# Altium PCB board_ordered.PcbDoc
Units mm, origin at the board's own origin, x right, y up, seen from the top; angles counter-clockwise.
Board outline 38 x 93.5 mm, 2 copper layers (Top Layer, Bottom Layer), stack 0.97 mm thick; 85 components, 62 nets, 308 pads, 297 vias.
Unrouted connection lines stored in the file: 1.
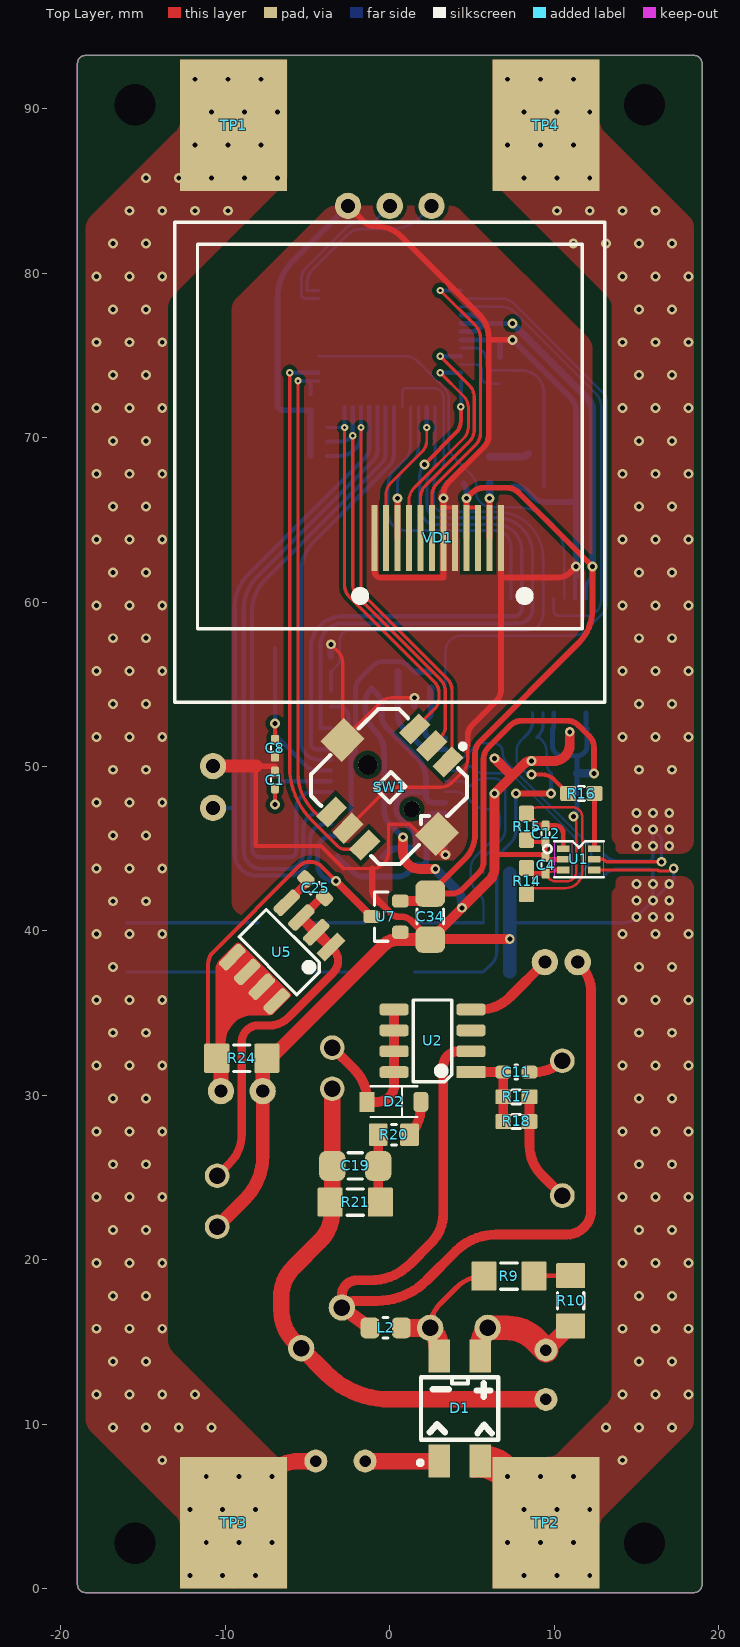
[diagram p0: Top Layer view]
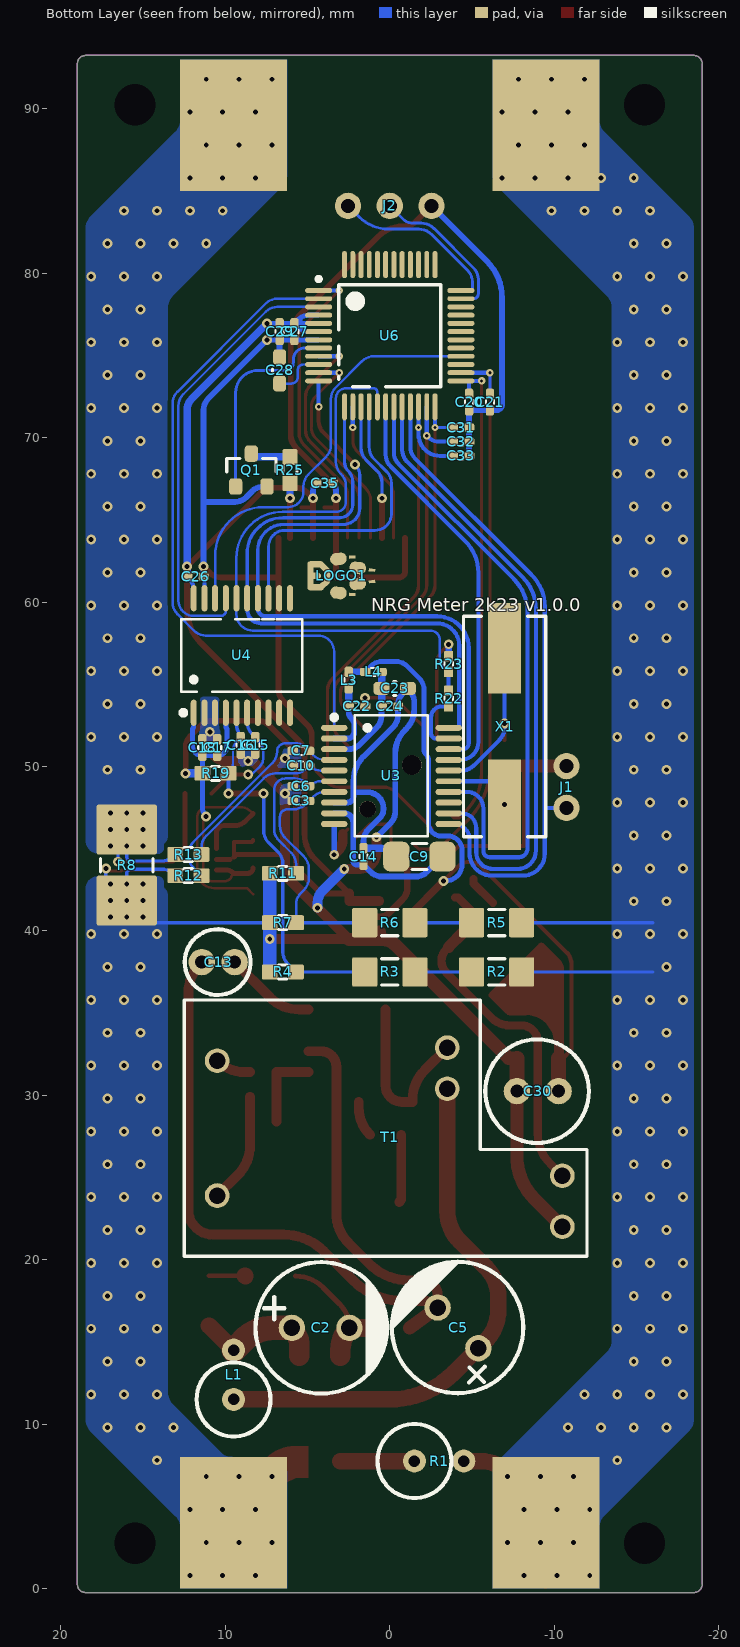
[diagram p1: Bottom Layer view, seen from below]
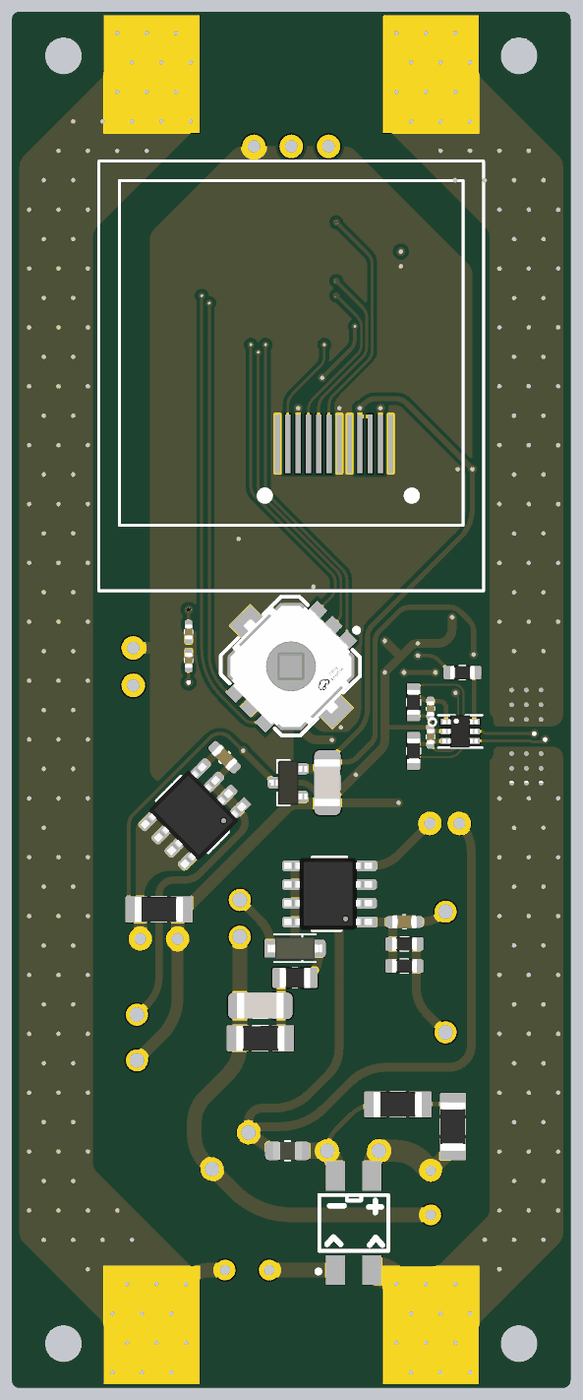
[diagram p2: 3D render of the assembled board from above, using the file's embedded part models]
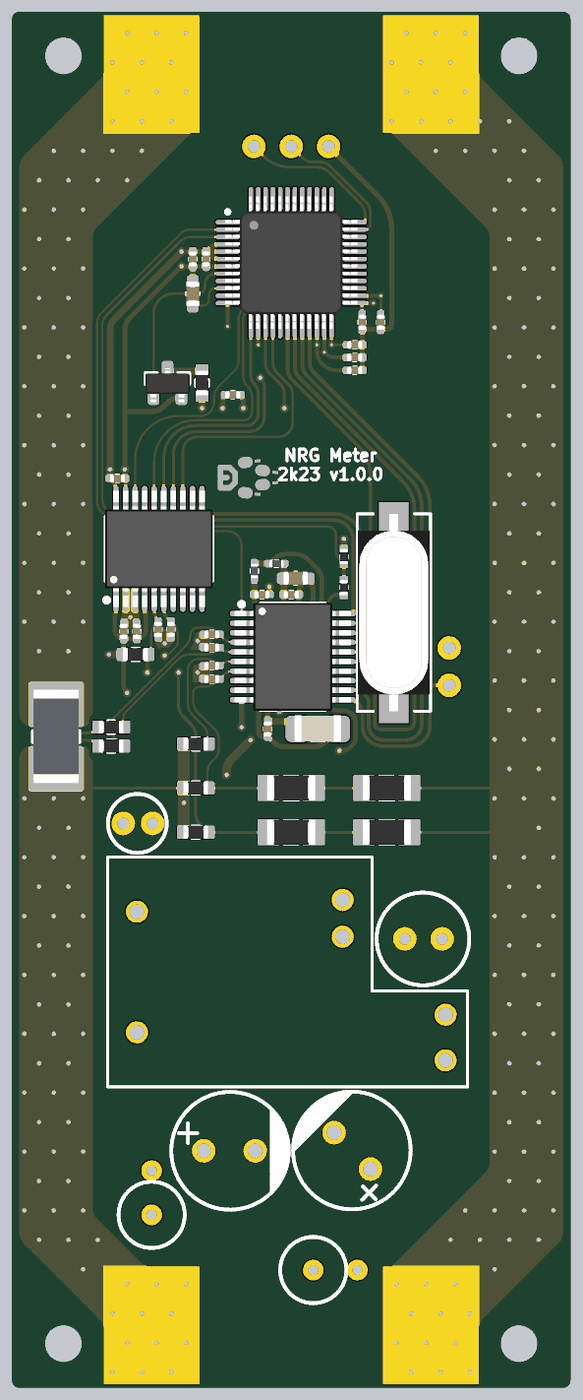
[diagram p3: 3D render of the assembled board from below, using the file's embedded part models]

## Layer stack, top to bottom
Top Solder: solder mask 0.0127, Solder Resist, Dk 3.8
Top Layer: signal copper 0.035
Dielectric: core 0.9, FR-4, Dk 4.5
Bottom Layer: signal copper 0.035
Bottom Solder: solder mask 0.0127, Solder Resist, Dk 3.8

## Board outline
-19,0.25 ccw(c-18.5,0.25) -18.5,-0.25 18.5,-0.25 ccw(c18.5,0.25) 19,0.25 19,92.75 ccw(c18.5,92.75) 18.5,93.25 -18.5,93.25 ccw(c-18.5,92.75) -19,92.75

## Design rules (kind name [scope] priority, off if disabled: settings)
AcuteAngle [All] p1: minimum=6.00000000000000E+0001 checktracksonly=FALSE
Clearance Clearance_1 [InNetClass('220')] p1: gap=2 ignorepadtopadclearanceinfootprint=FALSE except(0.13: Arc-Arc Arc-Track Arc-SMDPad Arc-Via Track-Track Track-SMDPad Track-Via SMDPad-SMDPad SMDPad-Via THPad-Via Via-Via; 0.15: Arc-THPad Arc-Text Arc-Hole Track-THPad Track-Text Track-Hole SMDPad-THPad SMDPad-Text SMDPad-Hole THPad-THPad THPad-Text THPad-Hole Via-Text Via-Hole Fill-Text Fill-Hole Poly-Text Poly-Hole Region-Text Region-Hole Text-Text Text-Hole)
Clearance [All] p2: gap=0.25 ignorepadtopadclearanceinfootprint=FALSE except(0.13: Arc-Arc Arc-Track Arc-SMDPad Arc-Via Track-Track Track-SMDPad Track-Via SMDPad-SMDPad SMDPad-Via THPad-Via Via-Via; 0.15: Arc-THPad Arc-Text Arc-Hole Track-THPad Track-Text Track-Hole SMDPad-THPad SMDPad-Text SMDPad-Hole THPad-THPad THPad-Text THPad-Hole Via-Text Via-Hole Fill-Text Fill-Hole Poly-Text Poly-Hole Region-Text Region-Hole Text-Text Text-Hole)
ComponentClearance ComponentClearance_1 [HasFootprint('HDR-1X3')] p1: gap=-1 collisioncheckmode=3 verticalgap=2540 showdistances=FALSE
ComponentClearance ComponentClearance_2 [HasFootprint('TP2030_SMD')] p2: gap=-1 collisioncheckmode=3 verticalgap=2540 showdistances=FALSE
ComponentClearance [All] p3: gap=0.3 collisioncheckmode=3 verticalgap=0.254 showdistances=FALSE
HoleSize [All] p1: absolutevalues=TRUE maxlimit=6 minlimit=0.2 maxpercent=80.000 minpercent=20.000
HoleToHoleClearance HoleToHoleClearance_1 [IsVia vs IsThruPin] p1: gap=0.7 allowstackedmicrovias=TRUE
HoleToHoleClearance [All] p2: gap=0.5 allowstackedmicrovias=TRUE
MinimumSolderMaskSliver [All] p1 off: minsoldermaskwidth=0.254
PlaneClearance [All] p1: clearance=0.45
PlaneConnect [All] p1: planeconnectstyle=Direct reliefexpansion=0.3 reliefentries=4 reliefconductorwidth=0.381 reliefairgap=0.178
PolygonConnect [All] p1: connectstyle=Direct reliefconductorwidth=0.381 reliefentries=4 polygonreliefangle="90 Angle" airgapwidth=0.356
RoutingVias [All] p1: holewidth=0.3 width=0.6 viastyle="Through Hole" minholewidth=0.2 minwidth=0.45 maxholewidth=0.9 maxwidth=1.27
SilkToSilkClearance [All] p1 off: silktosilkclearance=0.254
SilkToSolderMaskClearance [IsPad] p1 off: minsilkscreentomaskgap=0.254 clearancetoexposedcopper=TRUE
SolderMaskExpansion [All] p1: expansion=0.102 istentingtop=FALSE
UnRoutedNet [All] p1: checkbadconnections=TRUE
Width [All] p1: maxlimit=8 minlimit=0.14 preferedwidth=0.254
21 further rules are at their usual default settings.

## Components (designator, comment, footprint, x,y, rotation, side; value= is the part's Value field where it differs from the comment)
C1 "18pF" C0402 -6.982,49.175 r270 top
C2 "10uF" CAP-TH_BD8.0-P3.50-D0.6-FD_1 4.204,15.85 r180 bottom
C3 "33nF" C0402 5.409,47.902 r180 bottom
C4 "100nF" C0402 9.474,43.993 r270 top
C5 "10uF" CAP-TH_BD8.0-P3.50-D0.6-FD_1 -4.15,15.85 r45 bottom
C6 "33nF" C0402 5.409,48.806 r180 bottom
C7 "33nF" C0402 5.409,50.949 r180 bottom
C8 "18pF" C0402 -6.982,51.109 r90 top
C9 "10uF" C1206 -1.802,44.522 r180 bottom
C10 "33nF" C0402 5.409,50.045 r180 bottom
C11 "" C0603 7.7,31.406 r180 top
C12 "100nF" C0402 9.474,45.898 r90 top
C13 "4.7uF" CAP-TH_BD4.0-P2 10.435,38.1 r0 bottom
C14 "100nF" C0402 1.598,44.522 r270 bottom
C15 "33nF" C0402 8.179,51.283 r90 bottom
C16 "33nF" C0402 9.068,51.283 r90 bottom
C17 "100nF" C0402 10.5,51.15 r270 bottom
C18 "100nF" C0402 11.4,51.15 r270 bottom
C19 "" C1206 -2.1,25.7 r0 top
C20 "100nF" C0402 -4.825,72.161 r270 bottom
C21 "100nF" C0402 -6.092,72.161 r270 bottom
C22 "100nF" C0402 2,53.65 r0 bottom
C23 "1uF" C0603 -0.3,54.75 r0 bottom
C24 "100nF" C0402 0,53.65 r180 bottom
C25 "" C0603 -4.534,42.591 r315 top
C26 "100nF" C0402 11.828,61.544 r0 bottom
C27 "100nF" C0402 5.8,76.45 r90 bottom
C28 "100nF" C0603 6.7,74.092 r90 bottom
C29 "100nF" C0402 6.7,76.45 r90 bottom
C30 "680uF" CAP-TH_BD6.3-P2.54 -9,30.25 r0 bottom
C31 "100nF" C0402 -4.325,70.617 r0 bottom
C32 "100nF" C0402 -4.325,69.757 r0 bottom
C33 "100nF" C0402 -4.325,68.889 r0 bottom
C34 "10uF" C1206 2.464,40.866 r90 top
C35 "100nF" C0402 3.97,67.229 r0 bottom
D1 "MB10F-D" MINIDIP_4P-L4.7-W3.8-P2.50-LS7.0-BL 4.25,10.95 r0 top
D2 "1N4148WS" SOD-123 0.253,29.6 r180 top
J1 "CF" HDR-1X2_2.54 -10.75,48.75 r0 bottom
J2 "SWD" HDR-1X3_2.54 0,84.1 r90 bottom
L1 "" IND_TH 9.5,11.5 r90 bottom
L2 "" L0805 -0.25,15.85 r0 top
L3 "BEAD" L0402 2.5,55.25 r270 bottom
L4 "BEAD" L0402 1,55.75 r180 bottom
LOGO1 "LOGO" LOGO 4.826,61.595 r270 bottom
Q1 "PDTC143" SOT-23#1 8.423,68.029 r270 bottom
R1 "" IND_TH -1.5,7.75 r180 bottom
R2 "220k" R1206 -6.5,37.5 r0 bottom
R3 "220k" R1206 0,37.5 r0 bottom
R4 "3k3" R0603 6.5,37.5 r0 bottom
R5 "300k" R1206 -6.5,40.5 r0 bottom
R6 "300k" R1206 0,40.5 r0 bottom
R7 "1k" R0603 6.5,40.5 r0 bottom
R8 "" R2512-WIDE 16,44 r270 bottom
R9 "300k" R1206 7.25,19 r180 top
R10 "300k" R1206 11,17.5 r90 top
R11 "1k" R0603 6.5,43.5 r0 bottom
R12 "1k" R0603 12.25,43.356 r0 bottom
R13 "1k" R0603 12.25,44.644 r0 bottom
R14 "1k" R0603 8.319,43.028 r90 top
R15 "1k" R0603 8.319,46.33 r90 top
R16 "3k" R0603 11.65,48.354 r0 top
R17 "" R0603 7.7,29.906 r180 top
R18 "" R0603 7.7,28.406 r180 top
R19 "3k3" R0603 10.6,49.581 r180 bottom
R20 "" R0805 0.253,27.6 r180 top
R21 "" R1206 -2.1,23.5 r180 top
R22 "1k" R0402 -3.583,54.126 r270 bottom
R23 "2k" R0402 -3.584,56.226 r90 bottom
R24 "1k2" R1206 -9,32.25 r180 top
R25 "10" R0603 6.07,68.029 r90 bottom
SW1 "TM-4175-B-B" SW-SMD_TM-4175-B-X 0,48.75 r225 top
T1 "TRANS" TRANSFORMER 3.5,28 r180 bottom
TP1 "" TP2030_SMD -9.5,89 r180 top
TP2 "" TP2030_SMD 9.5,4 r180 top
TP3 "" TP2030_SMD -9.5,4 r180 top
TP4 "" TP2030_SMD 9.5,89 r180 top
U1 "INA199A2" SOT-363 11.5,44.35 r270 top
U2 "LP3715" SOIC-8 2.6,33.311 r90 top
U3 "ADE7753ARSZ" SSOP-20 -0.101,49.425 r270 bottom
U4 "MCP3561-E/ST" SSOP-20 9,56.75 r180 bottom
U5 "LP3568" SOIC-8 -6.579,38.709 r135 top
U6 "STM32G030C8T6" LQFP-48 0,76.2 r180 bottom
U7 "XC6206P332MR" SOT-23#2 -0.232,40.866 r0 top
VD1 "N133-2424TCBIG01-H12" LCD_PICO_1.3 0,68.5 r270 top
X1 "3.58MHz" HC-49S-SMD -6.982,52.428 r90 bottom

## Footprints (in the part's own frame and the unit in brackets; to place one, negate y for a bottom-side part, rotate by r counter-clockwise, add the part's x,y. Pads: shape width x height; smd on the part's side, far side on the other; paste and mask are expansions set on the pad)
C0402 [mm] "Chip Capacitor Body"
  rrect50% 0.635x0.508 smd mask+0.05: 1(-0.5,0) 2(0.5,0)
  silkscreen extent -0.13,-0.25 0.13,0.25, body extent -0.52,-0.27 0.53,0.28, height 0.55
C0603 [mil] "Chip Capacitor"
  rrect50% 38x31 smd mask+1.97: 1(-31.5,0) 2(31.5,0)
  silkscreen extent -3,-17 3,17, body extent -33,-18 33,18, height 35
C1206 [mm] "Chip Capacitor"
  rrect50% 1.6x1.8 smd: 1(-1.4,0) 2(1.4,0)
  silkscreen extent -0.45,-0.8 0.45,0.8, body extent -1.6,-0.88 1.6,0.92, height 1.6
CAP-TH_BD4.0-P2 [mm]
  round 1.6 hole 0.8 paste-2539.97 mask+0.051: 1(-1,0) 2(1,0)
  silkscreen extent -1.96,-2 2.04,2, body extent -2,-2 2.04,2, height 8
CAP-TH_BD6.3-P2.54 [mm]
  round 1.6 hole 0.8 paste-2539.97 mask+0.051: 1(-1.27,0) 2(1.27,0)
  silkscreen extent -3.11,-3.15 3.19,3.15, body extent -3.2,-3.2 3.2,3.2, height 8.3
CAP-TH_BD8.0-P3.50-D0.6-FD_1 [mm]
  round 1.6 hole 1 paste-2539.97 mask+0.051: 1(-1.75,0) 2(1.75,0)
  silkscreen extent -3.96,-4 4.04,4, body extent -4,-4 4,4, height 13
HC-49S-SMD [mm]
  rect 5.5x2 smd: 1(-4.75,0) 2(4.75,0)
  silkscreen extent -6.7,-2.5 6.7,2.5, body extent -6.7,-2.45 6.7,2.45, height 4.3
HDR-1X2_2.54 [mm]
  round 1.6 hole 0.85: 1(0,1.27) 2(0,-1.27)
HDR-1X3_2.54 [mm]
  round 1.6 hole 0.85: 1(0,2.54) 2(0,0) 3(0,-2.54)
IND_TH [mm]
  round 1.4 hole 0.7: 1(0,0) 2(3,0)
  silkscreen extent -2.25,-2.25 2.25,2.25, body extent -2.25,-2.25 2.25,2.25, height 9
L0402 [mm] "Chip Inductor"
  rrect50% 0.635x0.508 smd mask+0.05: 1(-0.5,0) 2(0.5,0)
  silkscreen extent -0.13,-0.25 0.13,0.25, body extent -0.5,-0.25 0.5,0.25, height 0.5
L0805 [mil] "Chip Inductor"
  rrect50% 45x50 smd mask+1.97: 1(-37.5,0) 2(37.5,0)
  silkscreen extent -6,-25 6,25, body extent -39,-24 39,24, height 35
LCD_PICO_1.3 [mm]
  rect 4x0.35 smd: 1(4.6,6.77) 2(4.6,6.07) 3(4.6,5.37) 4(4.6,4.67) 5(4.6,3.97) 6(4.6,3.27) 7(4.6,2.57) 8(4.6,1.87) 9(4.6,1.17) 10(4.6,0.47) 11(4.6,-0.23) 12(4.6,-0.93)
  silkscreen extent -14.6,-13.08 14.6,13.08, body extent -14.6,-13.08 14.6,13.08, height 1.51
LOGO [mil]
  rect 15.75x7.87 smd rot 93 mask+4: ""(-44.55,100)
  oval 30x40 smd rot 8 mask+4: ""(-40.55,67)
  oval 15x39.5 smd mask+4: ""(-27.5,12.5) ""(27.5,12.5)
  oval 15x36.21 smd rot 135 mask+4: ""(-20,32.5)
  oval 30x40 smd rot 173 mask+4: ""(-18.99,113.27)
  rect 15.75x7.87 smd rot 83 mask+4: ""(-13.91,147.15)
  oval 70x15 smd mask+4: ""(0,0)
  oval 15x32.5 smd mask+4: ""(0,9)
  oval 39.5x15 smd mask+4: ""(0,40)
  rect 15.75x7.87 smd rot 97 mask+4: ""(13.91,147.15)
  oval 30x40 smd rot 7 mask+4: ""(18.99,113.27)
  oval 15x36.21 smd rot 45 mask+4: ""(20,32.5)
  oval 30x40 smd rot 172 mask+4: ""(40.55,67)
  rect 15.75x7.87 smd rot 87 mask+4: ""(44.55,100)
LQFP-48 [mm]
  oval 1.65x0.3 smd: 1(-4.325,2.75) 2(-4.325,2.25) 3(-4.325,1.75) 4(-4.325,1.25) 5(-4.325,0.75) 6(-4.325,0.25) 7(-4.325,-0.25) 8(-4.325,-0.75) 9(-4.325,-1.25) 10(-4.325,-1.75) 11(-4.325,-2.25) 12(-4.325,-2.75) 25(4.325,-2.75) 26(4.325,-2.25) 27(4.325,-1.75) 28(4.325,-1.25) 29(4.325,-0.75) 30(4.325,-0.25) 31(4.325,0.25) 32(4.325,0.75) 33(4.325,1.25) 34(4.325,1.75) 35(4.325,2.25) 36(4.325,2.75)
  oval 0.3x1.65 smd: 13(-2.75,-4.325) 14(-2.25,-4.325) 15(-1.75,-4.325) 16(-1.25,-4.325) 17(-0.75,-4.325) 18(-0.25,-4.325) 19(0.25,-4.325) 20(0.75,-4.325) 21(1.25,-4.325) 22(1.75,-4.325) 23(2.25,-4.325) 24(2.75,-4.325) 37(2.75,4.325) 38(2.25,4.325) 39(1.75,4.325) 40(1.25,4.325) 41(0.75,4.325) 42(0.25,4.325) 43(-0.25,4.325) 44(-0.75,4.325) 45(-1.25,4.325) 46(-1.75,4.325) 47(-2.25,4.325) 48(-2.75,4.325)
  silkscreen extent -4.45,-3.1 3.1,3.57, body extent -4.5,-4.5 4.5,4.5, height 1.5
MINIDIP_4P-L4.7-W3.8-P2.50-LS7.0-BL [mm]
  rect 1.3x2 smd paste+0 mask+0.051: 1(-1.25,-3.2) 2(1.25,-3.2) 3(1.25,3.2) 4(-1.25,3.2)
  silkscreen extent -2.54,-3.44 2.35,1.9, body extent -2.5,-2 2.5,2, height 1.7
R0402 [mm]
  rrect10% 0.635x0.55 smd mask+0.05: 1(-0.476,0) 2(0.476,0)
  silkscreen extent -0.12,-0.25 0.13,0.25, body extent -0.52,-0.27 0.53,0.28, height 0.4
R0603 [mil] "Chip Resistor; Body 1.6 x 0.8 mm (LxW typ)"
  rrect20% 38x35.43 smd mask+1.97: 1(-31.5,0) 2(31.5,0)
  silkscreen extent -10,-17 10,17, body extent -33,-18 33,18, height 22
R0805 [mil] "Chip Resistor; Body 1.6 x 0.8 mm (LxW typ)"
  rrect15% 45x53.15 smd: 1(-37.5,0) 2(37.5,0)
  silkscreen extent -6,-25 6,25, body extent -41,-27 41,27, height 24
R1206 [mil] "Chip Resistor"
  rrect10% 60x70 smd mask+1.97: 1(-60,0) 2(60,0)
  silkscreen extent -20,-31 20,31, body extent -65,-33 65,33, height 26
R2512-WIDE [mm] "Chip Resistor; Body 6.4 x 3.2 mm (LxW typ)"
  rrect10% 3.05x3.68 smd mask+0.05: 1(-2.16,0) 2(2.16,0)
  silkscreen extent -0.4,-1.6 0.4,1.6, body extent -3.19,-1.55 3.16,1.55, height 0.55
SOD-123 [mm]
  rect 0.91x1.22 smd mask+0.05: 1(1.635,0)
  rrect50% 0.91x1.22 smd mask+0.05: 2(-1.635,0)
  silkscreen extent -1.43,-0.95 1.43,0.92, body extent -1.85,-0.77 1.85,0.77, height 1.44
SOIC-8 [mm]
  rect 0.72x1.78 smd mask+0.025: 1(-1.905,-2.34)
  rrect50% 0.72x1.78 smd mask+0.025: 2(-0.635,-2.34) 3(0.635,-2.34) 4(1.905,-2.34) 5(1.905,2.34) 6(0.635,2.34) 7(-0.635,2.34) 8(-1.905,2.34)
  silkscreen extent -2.49,-1.17 2.49,1.17, body extent -2.45,-2.9 2.45,3.1, height 1.7
SOT-23#1 [mm]
  rrect50% 1x0.8 smd mask+0.05: 1(1,-0.95) 2(1,0.95) 3(-1,0)
  silkscreen extent -0.7,-1.5 0.1,1.5, body extent -1.27,-1.5 1.33,1.5, height 1.1
SOT-23#2 [mm]
  rrect50% 1x0.8 smd mask+0.05: 1(0.875,-0.95) 2(0.875,0.95) 3(-0.875,0)
  silkscreen extent -0.7,-1.5 0.1,1.5, body extent -1.27,-1.5 1.33,1.5, height 1.1
SOT-363 [mil]
  rect 16x30 smd: 1(-25.59,-37.4) 2(0,-37.4) 3(25.59,-37.4) 4(25.59,37.4) 5(0,37.4) 6(-25.59,37.4)
  Top Layer keep-out region: -40.5,-15.75 -40.5,-59.06 40.5,-59.06 40.5,-15.75
  Top Layer keep-out region: -40.5,59.06 -40.5,15.75 40.5,15.75 40.5,59.06
  silkscreen extent -43,-85 43,59, body extent -43,-47 43,47, height 43
SSOP-20 [mm]
  oval 0.364x1.6 smd: 1(-2.925,-3.482) 2(-2.275,-3.482) 3(-1.625,-3.482) 4(-0.975,-3.482) 5(-0.325,-3.482) 6(0.325,-3.482) 7(0.975,-3.482) 8(1.625,-3.482) 9(2.275,-3.482) 10(2.925,-3.482) 11(2.925,3.482) 12(2.275,3.482) 13(1.625,3.482) 14(0.975,3.482) 15(0.325,3.482) 16(-0.325,3.482) 17(-0.975,3.482) 18(-1.625,3.482) 19(-2.275,3.482) 20(-2.925,3.482)
  silkscreen extent -3.71,-3.63 3.68,2.22, body extent -3.66,-3.95 3.66,3.95, height 1.98
SW-SMD_TM-4175-B-X [mm]
  rect 1.7x1 smd paste+0 mask+0.051: 1(-3.575,1.425) 2(-3.575,0.028) 3(-3.575,-1.425) 4(3.575,1.425) 5(3.575,-0.028) 6(3.575,-1.425)
  rect 2x1.8 smd paste+0 mask+0.051: 7(0,4.05) 7(0,-4.05)
  round 1 hole 1 unplated paste-2539.97: ""(0,1.9)
  round 1.2 hole 1.2 unplated paste-2539.97: ""(0,-1.9)
  silkscreen extent -5.04,-3.93 3.76,3.76, body extent -3.75,-4.28 3.75,4.22, height 5.65
TP2030_SMD [mm] "TP30_SMD"
  rect 6.5x8 all layers, no hole mask+0.05: 1(0,0)
TRANSFORMER [mm]
  round 1.5 hole 1: 1(-7,4.1) 2(-7,-4.1) 3(7,4.9) 4(7,2.4) 5(14,-2.9) 6(14,-6)
  silkscreen extent -9,-7.8 15.5,7.8, body extent -9,-7.8 15.5,7.8, height 12.5

## Part data
C1 C7 C8 C10: library part CAP, LCSC part number=C33149, P/N=GRM1555C1H180JA01D
C2 C5: library part 220uF, "01EC4138MHT10uF400V"
C3 C4 C6 C9 C11 C12 C14 C15 C16 C17 C18 C19 C20 C21 C22 C24 C25 C26 C27 C28 C29 C31 C32 C33 C34 C35: library part CAP
C13 C30: library part 220uF
C23: library part CAP, "1uF 50V 0603", LCSC part number=C90540, P/N=0603B105K500NT
D1: LCSC part number=C908753, P/N=MB10F-D
D2: library part US1M-13-F
J1: library part "Header 2"
J2: library part "Header 3"
L1 L2: library part BLM18AG601SN1D
L3 L4: library part BLM18AG601SN1D, "BEAD 0402", LCSC part number=C92615, P/N=CBG100505U600T
Q1: library part MMBT2222ALT1G, "PDTC143XT,215", LCSC part number=C183011, P/N=PDTC143XT,215
R1 R2 R3 R4 R5 R6 R7 R8 R9 R10 R11 R12 R13 R14 R15 R16 R17 R18 R19 R20 R21 R22 R23 R24 R25: library part RES
SW1: LCSC part number=C465996, P/N=TM-4175-B-B
T1: library part Component_2
TP1 TP2 TP3 TP4: library part TP_Dup1, LCSC part number=-, P/N=-
U1: library part MCP65R41T-2402
U2 U5: library part Component_1
U3: LCSC part number=C654528, P/N=ADE7753ARSZ
U7: library part Component_4_1
VD1: library part "Header 3", "N133-2424TCBIG01-H12 19650 Waveshare"
X1: library part "CRYSTAL 12MHZ 3.20mm x 2.50mm", "3.58MHz 20pF ±20ppm HC-49S"

## Free pads (board coordinates)
  round 0 hole 2.5 unplated: M(-15.5,2.75) M(-15.5,90.25) M(15.5,2.75) M(15.5,90.25)

## Via types
v1: diameter 0.6, hole 0.3, Top Layer to Bottom Layer, tented both sides, 287 vias
v2: diameter 0.45, hole 0.2, Top Layer to Bottom Layer, tented both sides, 10 vias

## Nets (pads, with @x,y where several pads share a name; then routed paths per layer and width w, separated by ;. In a path a pad name is that pad's centre, name@x,y a point inside that pad or via, vN(x,y) a via of type N, cw(c..) or ccw(c..) an arc to the next point about the centre after c; other vN are vias at no path point)
3V3: C4.2 C17.2 C18.2 C26.2 C27.2 C29.2 C34.2 C35.2 R14.2 R19.1 U1.3 U4.1 U4.4 U4.20 U6.4 U6.5 U6.6 U7.2 VD1.3 VD1.4 | length 105.9
  Top Layer w0.15: C4.2 9.579,43.493 ccw(c10.053,43.493) 10.053,43.019 10.765,43.019 ccw(c10.765,43.608) 11.354,43.608 11.354,46.535 ccw(c10.747,46.535) 11.352,46.586 ccw(c10.747,46.535) v1(11.176,46.965)
  Top Layer w0.25: VD1.4@4.67,65.754 VD1.3@5.37,65.754
  Top Layer w0.3: R14.2 ccw(c8.653,43.828) 8.653,43.493 C4.2 cw(c9.974,42.993) 9.974,43.7 U1.3
  Top Layer w0.35: VD1.4 4.67,65.754 v1(4.67,66.313) 5.021,66.664 cw(c5.722,65.964) 5.722,66.954 7.125,66.954 cw(c7.125,65.964) 7.826,66.664 v1(12.328,62.162) 12.328,59.533 cw(c9.48,59.533) 11.494,57.519 5.481,51.505 ccw(c6.181,50.805) 5.191,50.805 5.191,45.921 cw(c2.947,45.921) 4.534,44.335 C34.2 3.756,42.266 ccw(c3.756,43.256) 4.456,42.555 5.416,43.515 ; 5.417,43.516 ccw(c4.715,44.215) 5.706,44.215 5.706,50.457 cw(c6.697,50.457) 5.996,51.157 7.33,52.491 cw(c8.03,51.791) 8.03,52.781 10.791,52.781 cw(c10.791,51.791) 11.492,52.491 12.126,51.857 cw(c11.425,51.156) 12.416,51.156 v1(12.416,49.581)
  Top Layer w0.5: C34.2@1.974,41.761 C34.2@1.974,41.816
  Top Layer w0.6: U7.2 1.974,41.816 2.464,41.816 C34.2
  Bottom Layer w0.25: U4.20 11.925,60.73 cw(c12.916,60.73) 12.215,61.431 C26.2
  Bottom Layer w0.3: U6.6 4.921,76.45 ccw(c4.921,77.364) 5.568,76.718 C27.2 ; U6.5 C27.2 ; U6.4 4.921,77.45 cw(c4.921,76.536) 5.568,77.182 C27.2 ; v1(7.462,76.95) C29.2 C27.2 ; U4.4 9.975,52.424 cw(c9.864,52.424) 9.943,52.345 ccw(c10.045,52.243) 9.9,52.243 9.9,51.25 ccw(c10.5,51.25) C17.2 C18.2 ; v1(11.176,46.965) ccw(c10.635,47.505) 11.4,47.505 R19.1 C18.2 ; U4.1 11.925,52.424 ccw(c12.036,52.424) 11.957,52.345 cw(c11.855,52.243) 12,52.243 12,51.25 cw(c11.4,51.25) C18.2
  Bottom Layer w0.35: C35.2 cw(c3.987,66.746) 4.67,66.746 v1(4.67,66.313)
  Bottom Layer w0.45: v1(7.462,76.95) 12.038,72.374 ; 12.039,72.373 cw(c11.338,71.673) 12.328,71.673 v1(12.328,62.162) C26.2
  Bottom Layer w0.5: R19.1 v1(12.416,49.581)
5V: C30.1 L3.1 L4.1 R24.2 U5.5 U5.6 U5.7 U5.8 U7.3 | length 41.3
  Top Layer w0.25: R24.2 -11.049,32.775 -11.049,37.994 cw(c-10.058,37.994) -10.759,38.695 -5.545,43.909 cw(c-4.844,43.209) -4.144,43.909 v1(-3.277,43.042)
  Top Layer w0.45: v1@-3.28,43.039 U7.3
  Top Layer w0.9: C30.1 R24.2@-10.27,32.25
  Bottom Layer w0.3: v1(-3.277,43.042) -3.404,43.042 cw(c-3.404,44.032) -4.394,44.032 -4.394,44.907 cw(c-3.531,44.907) -3.531,45.771 -3.124,45.771 ccw(c-3.124,46.533) -2.362,46.533 -2.362,50.329 cw(c-1.743,50.329) -2.235,50.705 cw(c-1.743,50.329) -2.181,50.767 ccw(c-2.418,51.004) -2.083,51.004 -2.083,54.657 cw(c-1.092,54.657) -1.793,55.357 -1.052,56.098 cw(c-0.352,55.397) -0.352,56.388 0.452,56.388 cw(c0.452,55.397) 1.152,56.098 L4.1
  Bottom Layer w0.4: L4.1@1.578,55.75 L3.1
CF: J1.1 U3.11 U6.21 | length 40.5
  Bottom Layer w0.25: J1.1 -9.429,47.48 ; U3.11 -3.912,46.5 ccw(c-3.912,45.561) -4.851,45.561 -4.851,44.721 cw(c-6.214,44.721) -6.214,43.358 -8.093,43.358 cw(c-8.093,44.694) -9.429,44.694 -9.429,47.48 ; -1.54,68.742 -8.62,61.662 ccw(c-6.661,59.706) -9.429,59.706 -9.429,47.48 ; -1.539,68.742 ccw(c-2.241,69.442) -1.25,69.442 U6.21
CS_ADC: U4.13 U6.16 | length 18.7
  Bottom Layer w0.18: U6.16 1.25,69.402 cw(c0.259,69.402) 0.961,68.702 0.189,67.93 ccw(c0.889,67.23) -0.102,67.23 -0.102,65.354 ccw(c0.889,65.354) 0.889,64.364 6.384,64.364 cw(c6.384,63.373) 7.375,63.373 U4.13
CS_EM: U3.17 U6.18 | length 25
  Bottom Layer w0.25: U3.17 -4.311,50.4 cw(c-4.311,51.474) -5.385,51.474 -5.385,61.776 cw(c-2.633,61.776) -4.579,63.722 -0.04,68.26 ; -0.039,68.261 ccw(c-0.741,68.961) 0.25,68.961 U6.18
D_BL: Q1.1 U6.8 | length 12.4
  Bottom Layer w0.15: 6.351,74.092 7.396,74.092
  Bottom Layer w0.18: U6.8 5.17,75.45 cw(c5.17,74.752) 5.28,75.441 cw(c5.17,74.752) 5.867,74.752 5.867,74.576 ccw(c6.351,74.576) 6.351,74.092 ; 7.396,74.092 8.01,74.092 cw(c8.01,72.73) 9.373,72.73 Q1.1
D_CLK: U6.11 VD1.9 | length 13.4
  Top Layer w0.18: VD1.9 1.17,66.215 cw(c2.161,66.215) 1.46,66.916 4.485,69.941 ccw(c3.785,70.641) 4.775,70.641 4.775,71.831 ccw(c3.785,71.831) 4.486,72.531 v2(3.066,73.95)
  Bottom Layer w0.25: v2(3.066,73.95) U6.11
D_CS: U6.9 VD1.8 | length 14.4
  Top Layer w0.2: VD1.8 1.87,66.382 cw(c2.861,66.382) 2.16,67.083 4.84,69.762 ccw(c4.14,70.463) 5.13,70.463 5.13,72.476 ccw(c4.14,72.476) 4.841,73.176 ; v2(3.066,74.95) 4.84,73.176
  Bottom Layer w0.25: v2(3.066,74.95) U6.9
D_DATA: U6.15 VD1.10 | length 8.4
  Top Layer w0.35: VD1.10 v1(0.47,66.313)
  Bottom Layer w0.2: v1(0.47,66.313) 0.47,67.268 cw(c1.461,67.268) 0.759,67.968 ; 0.76,67.969 1.46,68.668 ; 1.461,68.669 ccw(c0.759,69.369) 1.75,69.369 U6.15
D_DC: U6.1 VD1.7 | length 18.4
  Top Layer w0.2: VD1.7 2.57,66.498 cw(c3.561,66.498) 2.86,67.198 5.224,69.562 ccw(c4.524,70.263) 5.514,70.263 5.514,76.092 ccw(c4.524,76.092) 5.225,76.791 v2(3.066,78.95)
  Bottom Layer w0.25: v2(3.066,78.95) U6.1
D_RST: U6.14 VD1.11 | length 8.9
  Top Layer w0.18: VD1.11 -0.23,66.543 cw(c0.761,66.543) 0.06,67.243 1.96,69.143 ccw(c1.259,69.843) 2.25,69.843 v2(2.25,70.616)
  Bottom Layer w0.25: v2(2.25,70.616) U6.14
ENC_A: C33.2 SW1.1 U6.22 | length 27.2
  Top Layer w0.2: v2(-1.75,70.616) -1.75,60.991 ccw(c-0.759,60.991) -1.46,60.291 3.494,55.337 cw(c2.794,54.636) 3.785,54.636 3.785,50.52 SW1.1
  Bottom Layer w0.25: C33.2 -3.056,68.889 ccw(c-3.056,70.196) -1.75,70.196 v2(-1.75,70.616) U6.22
ENC_B: C21.1 SW1.4 U6.26 | length 34.7
  Top Layer w0.2: v2(-6.092,73.95) -6.092,49.981 ccw(c-1.497,49.981) -4.746,46.732 -3.169,45.156 ccw(c-2.692,45.633) -2.692,44.958 -1.777,44.958 SW1.4
  Bottom Layer w0.2: C21.1 v2(-6.092,73.95)
  Bottom Layer w0.25: v2(-6.092,73.95) U6.26
ENC_BTN: C32.2 SW1.2 U6.23 | length 24.9
  Top Layer w0.2: v2(-2.25,70.108) -2.25,61.024 ccw(c-1.259,61.024) -1.961,60.325 ; -1.96,60.324 3.088,55.276 cw(c2.388,54.576) 3.378,54.576 3.378,52.407 cw(c2.609,52.407) 3.153,51.864 ; SW1.2 3.153,51.863
  Bottom Layer w0.25: C32.2 -3.011,69.757 ccw(c-3.011,70.748) -2.311,70.047 v2(-2.25,70.108) U6.23
ENC_C: C31.2 SW1.3 U6.24 | length 23.5
  Top Layer w0.2: v2(-2.75,70.616) -2.75,61.022 ccw(c-1.759,61.022) -2.461,60.322 2.707,55.154 cw(c2.007,54.454) 2.997,54.454 2.997,54.173 cw(c2.007,54.173) 2.708,53.473 ; SW1.3 2.707,53.472
  Bottom Layer w0.2: C31.2 v2(-2.75,70.616)
  Bottom Layer w0.25: v2(-2.75,70.616) U6.24
ENC_D: C20.1 SW1.6 U6.25 | length 29.9
  Top Layer w0.2: v2(-5.584,73.45) -5.584,49.579 ccw(c-2.377,49.579) -4.644,47.311 -4.22,46.887 -3.878,46.887 SW1.6
  Bottom Layer w0.2: U6.25@-4.825,73.45 U6.25
  Bottom Layer w0.25: v2(-5.584,73.45) -4.825,73.45 C20.1
GND: C1.1 C3.1 C4.1 C6.1 C7.1 C8.1 C9.1 C10.1 C12.1 C14.1 C15.1 C16.1 C17.1 C18.1 C20.2 C21.2 C22.1 C23.1 C24.2 C26.1 C27.1 C28.2 C29.1 C30.2 C31.1 C32.1 C33.1 C34.1 C35.1 D1.2 J1.2 J2.3 Q1.2 R4.2 R7.2 R8.2 R11.2 R12.2 R15.1 R23.2 R24.1 SW1.5 SW1.7 T1.6 TP2.1 U1.2 U1.4 U3.8 U3.10 U4.2 U4.3 U4.19 U6.7 U7.1 VD1.1 VD1.5 VD1.6 VD1.12 | length 269.3
  Top Layer w0.2: v1(-3.584,57.431) -3.154,57.001 cw(c-3.854,56.301) -2.994,56.791 cw(c-3.854,56.301) -2.864,56.301 -2.864,51.614 -0.589,53.888 cw(c0.111,53.188) 0.111,54.178 v1(1.499,54.178) ; -2.819,43.79 -1.067,43.79 ccw(c-1.067,44.78) -0.076,44.78 -0.076,46.482 1.228,46.482 SW1.7@2.238,45.471 ; SW1.5 -0.337,48.452 cw(c0.364,47.752) 0.364,48.743 3.095,48.743 ccw(c3.095,49.733) 3.795,49.033 4.409,49.646 ccw(c3.589,50.466) 4.748,50.466 4.748,51.257 ; SW1.7@2.558,46.192 SW1.7@2.864,45.886 ; U1.4 16.265,43.7 cw(c16.265,43.609) 16.329,43.673 ccw(c16.416,43.76) 16.416,43.637 16.877,43.637 ccw(c16.877,44.193) v1(17.27,43.8)
  Top Layer w0.25: -8.153,50.02 -8.153,45.161 -4.191,45.161 -2.819,43.79 ; VD1.6@3.27,65.754 VD1.5@3.97,65.754 ; R15.1 ccw(c8.45,45.53) 8.45,45.398 C12.1 C4.1
  Top Layer w0.3: 6.366,44.634 9.333,44.634 C4.1 ; C4.1@9.706,44.35 U1.2
  Top Layer w0.35: -8.153,50.02 -7,50.02 ; J2.3 -1.585,83.145 ; -1.584,83.144 ccw(c-0.884,83.845) -0.884,82.855 -0.805,82.855 cw(c-0.805,80.702) 0.717,82.224 5.412,77.529 cw(c3.945,76.062) 6.02,76.062 6.02,75.95 ; VD1.12 -0.93,61.868 ccw(c-0.556,61.868) -0.556,61.493 3.27,61.493 VD1.6 3.27,65.754 v1(3.27,66.313) 3.27,66.563 cw(c4.261,66.563) 3.56,67.263 5.73,69.433 ccw(c5.029,70.133) 6.02,70.133 6.02,75.95 ; 4.748,51.257 4.748,51.892 cw(c5.608,51.892) 5,52.5 6.48,53.98 ccw(c5.779,54.68) 6.77,54.68 6.77,61.493 ; VD1.1 6.77,61.493 ; v1(7.462,75.95) 6.02,75.95 ; v1(11.328,62.162) 10.95,61.784 cw(c10.25,62.484) 10.25,61.493 6.77,61.493
  Top Layer w0.4: -1.067,43.79 -1.067,42.611 ccw(c-0.076,42.611) -0.777,41.911 ; -0.777,41.91 0.086,41.048 ccw(c0.525,41.487) 0.525,40.866 0.653,40.866 cw(c0.653,39.875) 1.353,40.576 ; 1.354,40.575 C34.1
  Top Layer w0.6: v1(0.813,45.695) 0.813,44.755 ccw(c1.803,44.755) 1.803,43.764 v1(2.769,43.764) ; C34.1 C34.1@2.498,39.5 ; SW1.7@2.864,45.886 2.864,45.555 ccw(c3.854,45.555) 3.154,44.854 v1(3.381,44.628) ; v1(6.366,50.497) 7.437,49.425 ; v1(7.3,39.5) C34.1@2.498,39.5 ; v1(10.948,52.107) 10.948,51.321 cw(c9.957,51.321) 9.957,50.331 v1(8.611,50.331) ccw(c8.611,49.684) 8.153,50.141 7.437,49.425 ; C34.1@2.498,39.5 6.076,43.077 ccw(c5.375,43.778) 6.366,43.778 6.366,44.634 v1(6.366,48.354) 7.437,49.425
  Top Layer w0.8: J1.2 -8.153,50.02 ; T1.6 -8.86,23.64 ; -8.806,23.694 ccw(c-11.405,26.292) -7.73,26.292 C30.2 ; R24.1 -7.232,32.25 -0.306,39.175 cw(c0.394,38.475) 0.394,39.466 0.643,39.466 ; U7.1 0.643,39.466 ; C34.1 0.645,39.466 0.643,39.466
  Top Layer w0.9: C30.2 R24.1@-7.73,32.25
  Bottom Layer w0.2: R7.2 14.25,40.5 ccw(c14.25,41.491) 14.95,40.79 v1(16,41.84) ; R12.2 13.158,43.463 cw(c13.858,42.763) 13.858,43.753 15.732,43.753 cw(c15.732,43.485) 16,43.485 v1(16,41.84) ; v1(17.27,43.8) 17.27,43.11 v1(16,41.84)
  Bottom Layer w0.25: U4.19 11.275,61.491 C26.1
  Bottom Layer w0.3: U6.7 C29.1 v1(7.462,75.95)
  Bottom Layer w0.35: C33.1 C32.1 C31.1 C20.2 C21.2 -6.46,71.661 cw(c-6.46,72.034) -6.833,72.034 -6.833,78.501 cw(c-3.679,78.501) -5.909,80.731 J2.3 ; v1(0.813,45.695) -0.04,46.547 cw(c0.66,47.248) -0.33,47.248 -0.33,50.794 ccw(c-2.306,50.794) -0.909,52.192 -0.977,52.26 cw(c0.275,53.512) -1.496,53.512 -1.496,53.837 cw(c-0.246,53.837) -1.13,54.721 C23.1 -0.79,54.44 cw(c-1.491,53.739) -0.5,53.739 C24.2 -0.5,53.107 ccw(c0.491,53.107) -0.21,52.407 1.604,50.593 cw(c0.141,49.13) 2.21,49.13 2.21,48.438 ; C14.1 1.598,45.464 ccw(c0.608,45.464) 1.308,46.164 0.597,46.876 cw(c1.117,47.396) 0.381,47.396 0.381,47.447 cw(c1.372,47.447) 1.372,48.438 2.21,48.438 ; v1(3.27,66.313) 3.27,66.746 cw(c3.953,66.746) C35.1 ; v1(3.381,44.628) U3.10 ; U3.8 2.594,47.8 cw(c2.594,48.184) 2.21,48.184 2.21,48.438 ; C28.2 C29.1 ; v1(7.462,75.95) 11.038,72.374 cw(c10.338,71.673) 11.328,71.673 11.328,66.091 ; Q1.2 7.669,67.029 cw(c7.669,66.038) 8.369,66.738 8.727,66.381 ccw(c9.427,67.081) 9.427,66.091 11.328,66.091 ; C26.1 v1(11.328,62.162) 11.328,66.091
  Bottom Layer w0.4: R23.2 v1(-3.584,57.431) ; v1(1.499,54.178) 1.5,54.177 C22.1
  Bottom Layer w0.45: C9.1 C9.1@-0.192,44.732 ; C9.1@-0.191,44.733 cw(c0.508,44.032) 0.508,45.022 C14.1
  Bottom Layer w0.6: v1(2.769,43.764) 4.104,42.429 cw(c3.404,41.728) 4.394,41.728 v1(4.394,41.402)
  Bottom Layer w0.8: R4.2 v1(7.3,39.5) R7.2 R11.2
  other v1: 8.162,0.801 10.162,0.801 12.162,0.801 7.162,2.801 9.162,2.801 11.162,2.801 8.162,4.801 10.162,4.801 12.162,4.801 7.162,6.801 9.162,6.801 11.162,6.801 14.162,7.801 13.162,9.801 15.162,9.801 17.162,9.801 14.162,11.801 16.162,11.801 18.162,11.801 15.162,13.801 17.162,13.801 14.162,15.801 16.162,15.801 18.162,15.801 15.162,17.801 17.162,17.801 14.162,19.801 16.162,19.801 18.162,19.801 15.162,21.801 17.162,21.801 14.162,23.801 16.162,23.801 18.162,23.801 15.162,25.801 17.162,25.801 14.162,27.801 16.162,27.801 18.162,27.801 15.162,29.801 17.162,29.801 14.162,31.801 16.162,31.801 18.162,31.801 15.162,33.801 17.162,33.801 14.162,35.801 16.162,35.801 18.162,35.801 15.162,37.801 17.162,37.801 14.162,39.801 16.162,39.801 18.162,39.801 15,40.84 16,40.84 17,40.84 15,41.84 17,41.84 15,42.84 16,42.84 17,42.84
IRQ_ADC: U4.17 U6.3 | length 27.4
  Bottom Layer w0.15: U6.3 6.846,77.95 cw(c6.846,76.959) 7.545,77.661 ; 7.546,77.66 12.565,72.64 ; U4.17 9.975,59.446 ccw(c10.262,59.446) 10.262,59.159 11.927,59.159 ccw(c11.927,60.088) 12.856,60.088 12.856,71.94 ccw(c11.865,71.94) 12.566,72.64
IRQ_EM: U3.14 U6.19 | length 38.5
  Bottom Layer w0.25: U3.14 -4.699,48.45 ccw(c-4.699,47.459) -5.69,47.459 -5.69,44.869 cw(c-6.079,44.869) -6.079,44.479 -7.85,44.479 cw(c-7.85,45.011) -8.382,45.011 -8.382,59.407 cw(c-5.613,59.407) -7.573,61.363 -0.54,68.395 ccw(c-1.241,69.096) -0.25,69.096 U6.19
L: R1.2 R2.1 R5.1 TP1.1 TP3.1 | length 26.5
  Top Layer w1: TP3.1@-9.5,0.5 ccw(c-9.5,1.959) -8.041,1.959 -8.041,5.21 cw(c-5.501,5.21) -5.501,7.75 R1.2
  Bottom Layer w0.2: -16,37.5 R2.1 ; -16,40.5 R5.1
  other v1: -12.162,0.801 -10.162,0.801 -8.162,0.801 -11.162,2.801 -9.162,2.801 -7.162,2.801 -12.162,4.801 -10.162,4.801 -8.162,4.801 -11.162,6.801 -9.162,6.801 -7.162,6.801 -13.838,7.801 -16.838,9.801 -14.838,9.801 -12.838,9.801 -10.838,9.801 -17.838,11.801 -15.838,11.801 -13.838,11.801 -11.838,11.801 -16.838,13.801 -14.838,13.801 -17.838,15.801 -15.838,15.801 -13.838,15.801 -16.838,17.801 -14.838,17.801 -17.838,19.801 -15.838,19.801 -13.838,19.801 -16.838,21.801 -14.838,21.801 -17.838,23.801 -15.838,23.801 -13.838,23.801 -16.838,25.801 -14.838,25.801 -17.838,27.801 -15.838,27.801 -13.838,27.801 -16.838,29.801 -14.838,29.801 -17.838,31.801 -15.838,31.801 -13.838,31.801 -16.838,33.801 -14.838,33.801 -17.838,35.801 -15.838,35.801 -13.838,35.801 -16.838,37.801 -17.838,39.801 -15.838,39.801 -13.838,39.801 -16.838,41.801 -14.838,41.801 -17.838,43.801 -15.838,43.801 -13.838,43.801 -16.838,45.801 -14.838,45.801 -17.838,47.801 -15.838,47.801 -13.838,47.801 -16.838,49.801 -14.838,49.801 -17.838,51.801 -15.838,51.801 -13.838,51.801 -16.838,53.801 -14.838,53.801 -17.838,55.801 -15.838,55.801 -13.838,55.801 -16.838,57.801 -14.838,57.801 -17.838,59.801 -15.838,59.801 -13.838,59.801 -16.838,61.801 -14.838,61.801 -17.838,63.801 -15.838,63.801 -13.838,63.801 -16.838,65.801 -14.838,65.801 -17.838,67.801 -15.838,67.801 -13.838,67.801 -16.838,69.801 -14.838,69.801 -17.838,71.801 -15.838,71.801 -13.838,71.801 -16.838,73.801 -14.838,73.801 -17.838,75.801 -15.838,75.801 -13.838,75.801 -16.838,77.801 -14.838,77.801 -17.838,79.801 -15.838,79.801 -13.838,79.801 -16.838,81.801 -14.838,81.801 -15.838,83.801 -13.838,83.801 -11.838,83.801 -9.838,83.801 -14.838,85.801 -12.838,85.801 -10.838,85.801 -8.838,85.801 -6.838,85.801 -11.838,87.801 -9.838,87.801 -7.838,87.801 -10.838,89.801 -8.838,89.801 -6.838,89.801 -11.838,91.801 -9.838,91.801 -7.838,91.801
MCLK: U4.18 U6.28 | length 25.6
  Bottom Layer w0.15: U6.28 0.978,74.95 cw(c0.978,73.959) 1.678,74.66 3.302,73.036 cw(c2.617,72.351) 3.585,72.351 3.585,69.535 ccw(c4.576,69.535) 3.875,68.836 ; 3.876,68.835 4.968,67.743 ; 4.968,67.742 cw(c4.267,67.042) 5.258,67.042 5.258,66.7 ccw(c6.181,66.7) 6.181,65.777 7.668,65.777 cw(c7.668,62.82) 10.625,62.82 U4.18
MISO: R22.1 R23.1 U4.16 U6.17 | length 39
  Bottom Layer w0.15: R23.1 -3.225,56.108 ccw(c-3.654,56.536) -3.048,56.536 -3.048,57.683 cw(c-2.464,57.683) -2.464,58.267 8.334,58.267 ccw(c8.334,59.258) 9.325,59.258 U4.16 9.325,62.68 ccw(c6.513,62.68) 6.513,65.492 3.241,65.492 cw(c3.241,66.065) 2.667,66.065 2.667,67.077 cw(c3.658,67.077) 2.956,67.777 2.986,67.807 ccw(c2.286,68.508) 3.277,68.508 3.277,72.39 ccw(c2.648,72.39) 2.648,73.019 1.023,73.019 ccw(c1.023,72.746) 0.75,72.746 U6.17
  Bottom Layer w0.25: R22.1 R23.1
MOSI: U3.20 U4.15 U6.13 | length 37.4
  Bottom Layer w0.2: U6.13 2.75,68.526 cw(c1.915,68.526) 2.505,67.936 ccw(c3.096,67.345) 2.261,67.345 2.261,65.906 ccw(c3.034,65.906) 3.034,65.133 6.501,65.133 cw(c6.501,62.959) 8.675,62.959 U4.15
  Bottom Layer w0.25: U3.20 -4.22,52.35 -4.225,52.355 -4.225,57.349 cw(c-2.87,57.349) -2.87,58.704 7.823,58.704 ccw(c7.823,59.556) 8.675,59.556 U4.15
N_OUT: R8.1 R13.2 TP4.1 U1.5 | length 12.7
  Top Layer w0.2: U1.5 12.917,44.35 cw(c12.917,44.094) 13.097,44.275 ccw(c13.279,44.456) 13.279,44.2 v1(16.533,44.2)
  Bottom Layer w0.2: R13.2 13.158,44.537 ccw(c13.858,45.237) 13.858,44.247 15.732,44.247 ccw(c15.732,44.515) 16,44.515 v1(16,46.16) 16.533,45.627 v1(16.533,44.2)
  Bottom Layer w5: TP4.1@9.5,87.5 TP4.1
  other v1: 15,45.16 16,45.16 17,45.16 15,46.16 17,46.16 15,47.16 16,47.16 17,47.16 15.162,49.801 17.162,49.801 14.162,51.801 16.162,51.801 18.162,51.801 15.162,53.801 17.162,53.801 14.162,55.801 16.162,55.801 18.162,55.801 15.162,57.801 17.162,57.801 14.162,59.801 16.162,59.801 18.162,59.801 15.162,61.801 17.162,61.801 14.162,63.801 16.162,63.801 18.162,63.801 15.162,65.801 17.162,65.801 14.162,67.801 16.162,67.801 18.162,67.801 15.162,69.801 17.162,69.801 14.162,71.801 16.162,71.801 18.162,71.801 15.162,73.801 17.162,73.801 14.162,75.801 16.162,75.801 18.162,75.801 15.162,77.801 17.162,77.801 14.162,79.801 16.162,79.801 18.162,79.801 11.162,81.801 13.162,81.801 15.162,81.801 17.162,81.801 10.162,83.801 12.162,83.801 14.162,83.801 16.162,83.801 8.162,85.801 10.162,85.801 12.162,85.801 7.162,87.801 9.162,87.801 11.162,87.801 8.162,89.801 10.162,89.801 12.162,89.801 7.162,91.801 9.162,91.801 11.162,91.801
NetC1_2: C1.2 U3.15 X1.1 | length 5.3
  Top Layer w0.25: v1(-6.982,47.678) C1.2
  Bottom Layer w0.25: X1.1@-6.982,47.988 -6.982,48.507 cw(c-6.389,48.507) -6.389,49.1 U3.15
NetC2_1: C2.1 D1.3 L1.2 R10.1 | length 7.9
  Top Layer w1: L1.2 10.959,15.959 cw(c11,15.918) R10.1
  Top Layer w1.25: D1.3 5.5,14.754 cw(c7.05,14.754) C2.1
  Top Layer w1.5: C2.1 7.098,15.85 cw(c7.098,13.31) 8.894,15.106 L1.2
NetC2_2: C2.2 D1.4 L2.2 R9.2 | length 8.5
  Top Layer w0.3: C2.2 cw(c4.515,15.85) 3.058,17.308 4.06,18.31 cw(c5.726,16.644) R9.2
  Top Layer w1.1: L2.2 C2.2
  Top Layer w1.25: C2.2 cw(c1.135,14.532) 3,14.532 D1.4
NetC3_2: C3.2 R6.2 R7.1 U3.7 | length 15.4
  Bottom Layer w0.15: U3.7 3.95,48.45 cw(c3.95,47.459) 4.651,48.16 C3.2 5.087,47.723 ccw(c5.878,48.514) 5.878,47.396 6.223,47.396 cw(c6.223,46.938) 6.68,46.938 6.68,46.384 cw(c5.69,46.384) 6.39,45.684 5.218,44.512 ccw(c5.918,43.811) 4.928,43.811 4.928,43.189 ccw(c5.918,43.189) 5.218,42.488 5.41,42.296 cw(c4.709,41.596) 5.7,41.596 R7.1
  Bottom Layer w0.2: R6.2 R7.1
NetC5_1: C5.1 C19.1 L1.1 R21.2 T1.4 | length 33.2
  Top Layer w1: C5.1 -3.887,13.112 ccw(c0.005,17.005) 0.005,11.5 L1.1 ; C5.1@-5.358,14.657 cw(c-3.837,16.963) -6.6,16.963 -6.6,17.731 cw(c-4.06,17.731) -5.856,19.527 -4.253,21.131 ccw(c-6.071,22.949) -3.5,22.949 T1.4
NetC5_2: C5.2 C11.1 C13.2 L2.1 T1.1 U2.2 | length 57.7
  Top Layer w0.6: U2.2 4.176,32.676 ccw(c4.176,31.75) 3.25,31.75 3.25,22.802 cw(c0.71,22.802) 2.506,21.006 1.244,19.744 cw(c-1.156,22.144) -1.156,18.75 -2,18.75 ccw(c-2,17.837) -2.913,17.837 C5.2 -2.793,17.207 cw(c-2.093,16.506) -2.093,17.497 -0.769,17.497 ccw(c-0.769,21.762) 2.246,18.746 4.006,20.506 cw(c6.47,18.042) 6.47,21.527 10.765,21.527 ccw(c10.765,23.012) 12.25,23.012 12.25,36.233 ccw(c9.71,36.233) 11.506,38.029 C13.2 ; C11.1 8.824,31.406 ccw(c8.824,33.776) T1.1
  Top Layer w0.8: C5.2 L2.1
NetC6_2: C6.2 R11.1 U3.6 | length 9.8
  Bottom Layer w0.15: U3.6 4.204,49.1 cw(c4.204,48.109) 4.905,48.81 C6.2 C6.2@5.087,48.984 ; C6.2@5.088,48.985 cw(c5.788,48.284) 5.788,49.275 6.318,49.275 cw(c6.318,48.556) 7.036,48.556 7.036,47.371 7.036,46.207 cw(c6.045,46.207) 6.746,45.506 5.99,44.75 ccw(c6.691,44.05) 5.7,44.05 R11.1
NetC7_2: C7.2 R12.1 U3.4 | length 14.3
  Bottom Layer w0.14: U3.4 3.95,50.4 ccw(c3.95,51.391) 4.65,50.69 C7.2
  Bottom Layer w0.15: C7.2 5.087,51.127 cw(c5.788,50.427) 5.788,51.417 6.342,51.417 cw(c6.342,50.902) 6.858,50.902 ccw(c7.839,50.902) 6.909,50.59 ccw(c7.839,50.902) 7.145,50.208 11.953,45.401 cw(c11.252,44.7) 12.243,44.7 12.243,44.559 cw(c11.252,44.559) 11.953,43.858 R12.1 ; R12.1@11.45,43 R12.1@11.628,43.178
NetC8_2: C8.2 U3.16 X1.2 | length 10.5
  Top Layer w0.25: C8.2 v1(-6.982,52.606)
  Bottom Layer w0.25: X1.2 -6.982,52.35 ccw(c-5.991,52.35) -6.692,51.65 -5.082,50.04 ccw(c-4.382,50.741) -4.382,49.75 U3.16
NetC9_2: C9.2 C14.2 U3.9 | length 10.1
  Bottom Layer w0.35: C9.2 -2.27,43.59 ccw(c-1.569,44.291) -1.569,43.3 0.466,43.3 ccw(c0.466,44.291) 1.166,43.59 C14.2 1.965,44.022 ccw(c1.965,44.283) 2.226,44.283 2.226,46.612 cw(c2.764,46.612) 2.764,47.15 U3.9
NetC10_2: C10.2 R13.1 U3.5 | length 10.4
  Bottom Layer w0.15: U3.5 4.204,49.75 ccw(c4.204,50.741) 4.904,50.04 C10.2 C10.2@5.087,49.866 ; C10.2@5.088,49.865 ccw(c5.788,50.566) 5.788,49.576 6.961,49.576 cw(c6.961,48.585) 7.661,49.286 11.16,45.787 cw(c10.459,45.087) 11.45,45.087 R13.1@11.45,45
NetC11_2: C11.2 R17.2 R18.2 U2.1 | length 5
  Top Layer w0.6: U2.1 C11.2 R17.2 R18.2
NetC12_2: C12.2 R14.1 R15.2 U1.1 | length 15
  Top Layer w0.15: R14.1 8.691,42.6 10.681,42.6 ccw(c10.681,43.638) 11.72,43.638 11.72,46.889 ccw(c11.082,46.889) 11.082,47.527 9.126,47.527 ccw(c9.126,46.536) 8.425,47.236 R15.2
  Top Layer w0.3: R15.2 8.76,46.688 ccw(c9.461,47.388) 9.461,46.398 C12.2 10.083,46.398 cw(c10.083,45.931) 10.55,45.931 U1.1
NetC13_1: C13.1 U2.4 | length 5.6
  Top Layer w0.6: U2.4 5.499,35.216 ccw(c5.499,37.756) 7.295,35.96 C13.1
NetC15_2: C15.2 R16.1 U4.6 | length 7.2
  Top Layer w0.25: v1(8.611,49.505) 9.289,49.505 cw(c9.289,48.514) 9.988,49.215 R16.1
  Bottom Layer w0.15: C15.2@7.999,51.603 ccw(c8.701,50.903) 7.71,50.903 7.71,50.434 ccw(c8.27,50.434) 7.874,50.038 8.264,49.648 ccw(c8.611,49.995) v1(8.611,49.505) ; C15.2@8,51.604 C15.2
  Bottom Layer w0.2: C15.2 8.385,51.989 ccw(c7.684,52.689) 8.675,52.689 U4.6
NetC16_2: C16.2 R3.2 R4.1 R19.2 U4.5 | length 23.1
  Top Layer w0.35: v1(7.671,48.354) v1(9.8,48.354)
  Bottom Layer w0.15: C16.2 C16.2@9.246,51.604 ; C16.2@9.247,51.603 cw(c8.546,50.903) 9.537,50.903 9.537,50.216 ccw(c10.435,50.216) R19.2
  Bottom Layer w0.2: R3.2 R4.1 6.212,38.012 ccw(c5.512,38.713) 6.502,38.713 6.502,44.09 cw(c7.493,44.09) 6.793,44.791 7.381,45.379 ccw(c6.68,46.08) 7.671,46.08 v1(7.671,48.354) ; C16.2@8.939,51.759 9.035,51.856 ccw(c8.334,52.556) 9.325,52.556 U4.5
  Bottom Layer w0.25: v1(9.8,48.354) R19.2
NetC19_2: C19.2 R20.2 R21.1 | length 4.1
  Top Layer w0.6: R20.2 C19.2 -0.7,23.799 ccw(c-0.277,23.799) R21.1
NetC22_2: C22.2 L3.2 U3.2 | length 4.2
  Bottom Layer w0.35: C22.2 2.5,53.328 cw(c1.943,53.328) 2.337,52.934 ccw(c2.766,52.504) 2.159,52.504 2.159,52.121 ccw(c2.58,52.121) 2.58,51.7 U3.2
  Bottom Layer w0.45: C22.2 L3.2
NetC23_2: C23.2 C24.1 L4.2 U3.3 | length 6.6
  Bottom Layer w0.35: C24.1 0.5,53.073 ccw(c1.491,53.073) 0.79,52.372 1.822,51.34 ccw(c2.523,52.041) 2.523,51.05 U3.3
  Bottom Layer w0.45: C24.1 C23.2 L4.2
NetC25_1: C25.1 U5.4 | length 1.9
  Top Layer w0.5: U5.4 -5.1,42.882 C25.1
NetC25_2: C25.2 T1.5 U5.1 U5.2 U5.3 | length 22.3
  Top Layer w0.5: T1.5 -9.744,25.856 ccw(c-11.54,27.652) -9,27.652 -9,33.259 cw(c-8.009,33.259) -8.009,34.25 -7.293,34.25 ccw(c-7.293,35.793) -6.202,34.702 -3.433,37.471 ccw(c-4.133,38.172) -3.433,38.872 U5.1 ; U5.3 -4.16,42.026 C25.2
  Top Layer w0.7: U5.3 U5.2 U5.1
NetC28_1: C28.1 U6.10 | length 3.2
  Bottom Layer w0.15: U6.10 5.268,74.45 cw(c5.268,74.122) 5.596,74.122 5.596,73.685 ccw(c5.989,73.685) 5.989,73.292 C28.1
NetD1_1: D1.1 R1.1 | length 4.5
  Top Layer w1: R1.1 D1.1
NetD2_1: D2.1 T1.3 U2.5 U2.6 U2.7 U2.8 | length 10.9
  Top Layer w0.6: T1.3 -2.126,31.526 cw(c-3.922,29.73) -1.382,29.73 D2.1 -0.731,29.6 ccw(c-0.731,30.591) 0.26,30.591 U2.8 U2.7 U2.6 U2.5
NetD2_2: D2.2 R20.1 | length 2.2
  Top Layer w0.6: R20.1 ccw(c-0.443,29.248) 1.888,29.248 D2.2
NetQ1_3: Q1.3 R25.2 | length 2.4
  Bottom Layer w0.45: R25.2 7.94,68.829 ccw(c7.94,69.511) Q1.3
NetR2_2: R2.2 R3.1 | length 3.5
  Bottom Layer w0.2: R2.2 R3.1
NetR5_2: R5.2 R6.1 | length 3.5
  Bottom Layer w0.2: R5.2 R6.1
NetR9_1: R9.1 R10.2 | length 2.2
  Top Layer w0.3: R9.1@8.832,19.024 R10.2
  Top Layer w1: R9.1 cw(c8.832,18.942) R9.1@8.832,19.024
NetR16_2: R16.2 U1.6 | length 3.4
  Top Layer w0.3: U1.6 R16.2
NetR17_1: R17.1 R18.1 T1.2 | length 6.7
  Top Layer w0.6: R17.1 R18.1 8.5,26.952 ccw(c11.04,26.952) 9.244,25.156 T1.2
NetR22_2: R22.2 U3.19 | length 3.7
  Bottom Layer w0.25: U3.19 -2.808,51.7 ccw(c-2.808,51.994) -2.515,51.994 -2.515,53.002 ccw(c-3.163,53.002) -3.163,53.65 R22.2
NetR25_1: R25.1 VD1.2 | length 3.3
  Top Layer w0.35: VD1.2 v1(6.07,66.313)
  Bottom Layer w0.45: v1(6.07,66.313) R25.1
RST_EM: U3.1 U6.2 | length 39.8
  Bottom Layer w0.15: U3.1 3.381,56.972 cw(c4.371,56.972) 4.371,57.963 11.197,57.963 ccw(c11.197,58.953) 11.898,58.253 12.917,59.272 ccw(c12.217,59.972) 13.207,59.972 13.207,72.086 ccw(c12.217,72.086) 12.918,72.785 ; U6.2 6.843,78.45 cw(c6.843,77.459) 7.542,78.161 ; 7.543,78.16 12.917,72.786
SCK: U3.18 U4.14 U6.12 | length 41.3
  Top Layer w0.25: v1(2.108,68.377) 4.035,70.303 ; 4.036,70.304 ccw(c3.334,71.004) 4.325,71.004 v2(4.325,71.875)
  Bottom Layer w0.2: v1(2.108,68.377) ccw(c2.783,67.702) 1.829,67.702 1.829,65.714 ccw(c2.819,65.714) 2.819,64.723 6.453,64.723 cw(c6.453,63.151) 8.025,63.151 U4.14
  Bottom Layer w0.25: U3.18 -4.441,51.05 cw(c-4.441,51.41) -4.801,51.41 -4.801,57.208 cw(c-2.876,57.208) -2.876,59.133 7.544,59.133 ccw(c7.544,59.614) 8.025,59.614 U4.14 ; v2(4.325,71.875) U6.12
SWCLK: J2.1 U6.36 | length 10.8
  Bottom Layer w0.18: U6.36 -5.029,78.95 -5.029,79.473 cw(c-4.039,79.473) -4.74,80.172 -2.552,82.36 cw(c-1.764,81.572) -1.764,82.687 0.066,82.687 ccw(c0.066,85.247) 1.877,83.437 J2.1
SWDIO: J2.2 U6.35 | length 9.5
  Bottom Layer w0.18: U6.35 -5.095,78.45 cw(c-5.095,78.74) -5.385,78.74 -5.385,79.625 cw(c-4.394,79.625) -5.095,80.326 -2.704,82.716 cw(c-1.916,81.928) -1.916,83.042 -1.417,83.042 ccw(c-1.417,83.909) -0.804,83.296 J2.2
ZC: U3.12 U6.20 | length 38.7
  Bottom Layer w0.25: U3.12 -4.369,47.15 ccw(c-4.369,46.259) -5.26,46.259 -5.26,44.781 cw(c-6.277,44.781) -6.277,43.764 -7.775,43.764 cw(c-7.775,44.874) -8.885,44.874 -8.885,59.564 cw(c-6.117,59.564) -8.076,61.52 -1.04,68.556 ; -1.039,68.557 ccw(c-1.741,69.256) -0.75,69.256 U6.20
pads on no net: LOGO1. SW1. U2.3 U3.13 U4.7 U4.8 U4.9 U4.10 U4.11 U4.12 U6.27 U6.29 U6.30 U6.31 U6.32 U6.33 U6.34 U6.37 U6.38 U6.39 U6.40 U6.41 U6.42 U6.43 U6.44 U6.45 U6.46 U6.47 U6.48

## Polygon pours and split planes (outlines as drawn)
L on Bottom Layer "Bottom Layer-L" (solid, remove dead copper, pour order 9): -23.5,-6.25 -6.25,-6.25 -6.25,7.009 ccw(c-7.241,7.009) -6.611,7.775 -13.21,14.38 cw(c-12.509,15.08) -13.5,15.08 -13.5,77.92 cw(c-12.509,77.92) -13.21,78.62 -6.611,85.225 ccw(c-7.241,85.991) -6.25,85.991 -6.25,99.25 -23.5,99.25 -23.5,-3.75
N_OUT on Bottom Layer "NONET_L02_P-001" (solid, remove dead copper, pour order 7): 6.54,85.29 13.21,78.62 cw(c12.509,77.92) 13.5,77.92 13.5,64.276 13.5,44.542 23.5,44.542 23.5,99.25 6.25,99.25 6.25,85.991 ccw(c7.241,85.991)
GND on Bottom Layer "NONET_L02_P-001" (solid, remove dead copper, pour order 4): 13.5,11.91 cw(c12.509,11.91) 13.21,11.21 10.29,8.29 cw(c9.59,8.991) 9.59,8 7.144,7.995 ccw(c7.241,7.009) 6.25,7.009 6.25,-6.25 23.5,-6.25 23.5,43.333 13.5,43.333
GND on Bottom Layer "NONET_L02_P-001" (solid, remove dead copper, pour order 1): 5.743,51.783 ccw(c5.743,50.949) 4.909,50.949 4.909,47.902 ccw(c5.872,47.902) 5.872,46.938 8.809,46.938 ccw(c8.809,47.929) 9.8,47.929 9.8,51.051 ccw(c9.068,51.051) 9.068,51.783
GND on Bottom Layer "NONET_L02_P-001" (solid, pour order 0): 10.617,54.254 ccw(c10.617,54) 10.363,54 10.363,52.269 cw(c10.19,52.269) 10.312,52.146 ccw(c10.496,51.962) 10.236,51.962 10.236,51.439 ccw(c10.351,51.439) 10.351,51.324 11.53,51.324 ccw(c11.53,51.454) 11.66,51.454 11.66,51.995 ccw(c11.482,51.995) 11.608,52.121 cw(c11.792,52.305) 11.532,52.305 11.532,54.051 ccw(c11.328,54.051) 11.328,54.254
GND on Top Layer "NONET_L02_P-001" (solid, remove dead copper, pour order 14): 12.029,58.028 ccw(c11.328,58.729) 12.319,58.729 12.319,75.409 ccw(c11.328,75.409) 12.029,76.109 4.328,83.81 ccw(c3.628,83.109) 3.628,84.1 -3.272,84.1 ccw(c-3.272,83.109) -3.973,83.81 -9.336,78.446 ccw(c-8.636,77.745) -9.627,77.745 -9.627,41.856 ccw(c-8.636,41.856) -8.636,40.866 -0.838,40.866 ccw(c-0.838,41.856) 0.152,41.856 0.152,45.7 cw(c0.729,45.7) 0.729,46.277 0.941,46.277 cw(c0.941,45.822) 1.397,45.822 1.397,45.288 ccw(c2.388,45.288) 2.388,44.298 4.826,44.298 ccw(c4.826,45.288) 5.817,45.288 5.817,51.816
L on Top Layer "Top Layer-L" (solid, remove dead copper, pour order 12): -23.5,-6.25 -6.25,-6.25 -6.25,7.009 ccw(c-7.241,7.009) -6.611,7.775 -13.21,14.38 cw(c-12.509,15.08) -13.5,15.08 -13.5,77.92 cw(c-12.509,77.92) -13.21,78.62 -6.611,85.225 ccw(c-7.241,85.991) -6.25,85.991 -6.25,99.25 -23.5,99.25 -23.5,-3.75
N_OUT on Top Layer "NONET_L02_P-001" (solid, remove dead copper, pour order 11): 6.54,85.29 13.21,78.62 cw(c12.509,77.92) 13.5,77.92 13.5,64.276 13.5,44.542 23.5,44.542 23.5,99.25 6.25,99.25 6.25,85.991 ccw(c7.241,85.991)
GND on Top Layer "NONET_L02_P-001" (solid, remove dead copper, pour order 10): 13.5,11.91 cw(c12.509,11.91) 13.21,11.21 10.29,8.29 cw(c9.59,8.991) 9.59,8 7.144,7.995 ccw(c7.241,7.009) 6.25,7.009 6.25,-6.25 23.5,-6.25 23.5,43.333 13.5,43.333

## Keep-outs
Keep-Out Layer:
  the board outline again, w0

## Other copper
Top Layer:
  region net 5V: -10.169,38.421 -10.302,38.289 ccw(c-9.601,37.588) -10.592,37.588 -10.592,31.655 -10,31.655 -10,33.18 cw(c-8.31,33.18) -8.31,34.87 -7.326,34.87 ccw(c-7.326,35.254) -7.055,34.982 -6.056,35.981 ccw(c-6.142,36.068) -6.02,36.068 ccw(c-6.265,36.068) -6.092,36.241 -9.047,39.197 ccw(c-9.22,39.023) -9.22,39.268 ccw(c-9.22,39.023) -9.394,39.197
  region net GND: 4.958,8.653 5.778,8.653 cw(c5.778,6.225) 7.494,7.942 cw(c6.043,7.043) 7.75,7.043 7.75,6.25 6.5,6.25 ccw(c5.293,5.043) 5.293,6.75 4.958,6.75
Bottom Layer:
  region net 3V3: 5.3,77.3 5.3,76.624 5.521,76.624 5.521,77.3
Multi-Layer:
  pour cut-out: 18.5,22.788 18.5,10.276 cw(c17.509,10.276) 18.21,9.575 13.04,4.405 ccw(c13.741,3.705) 12.75,3.705 12.75,-3 0,-3 0,-4.5 21.25,-4.5 21.25,96.25 -22,96.25 -22,-4.5 -1.5,-4.5 -1.5,-3 -12.75,-3 -12.75,3.729 ccw(c-13.741,3.729) -13.04,4.43 -18.21,9.599 cw(c-17.509,10.3) -18.5,10.3 -18.5,82.722 cw(c-17.509,82.722) -18.21,83.423 -13.04,88.592 ccw(c-13.741,89.293) -12.75,89.293 -12.75,93.25 12.75,93.25 12.75,89.309 ccw(c13.741,89.309) 13.04,88.609 18.21,83.439 cw(c17.509,82.739) 18.5,82.739 18.5,78 18.5,45.5 cw(c17.692,45.5) 17.692,44.692 14.058,44.692 cw(c14.058,45) 13.75,45 13.75,45.132 ccw(c13.417,45.132) 13.652,45.368 cw(c14.02,45.736) 13.5,45.736 13.5,46.75 13,46.75 13,41.25 13.5,41.25 13.5,42.188 cw(c14.01,42.188) 13.649,42.548 ccw(c13.407,42.791) 13.75,42.791 13.75,43 cw(c14.069,43) 14.069,43.319 17.757,43.319 cw(c17.757,42.577) 18.5,42.577

## Silkscreen, mask and mechanical layers (free items; w line width, h text height)
Bottom Overlay:
  text "NRG Meter 2k23 v1.0.0" at 1.117,59.436 h0.8